# Altium PCB ElectromagneticPositioning.PcbDoc (part 1 of 3)
Units mm, origin at the board's own origin, x right, y up, seen from the top; angles counter-clockwise.
Board outline 163.96 x 78.23 mm, 2 copper layers (Top Layer, Bottom Layer); 269 components, 166 nets, 989 pads, 249 vias.
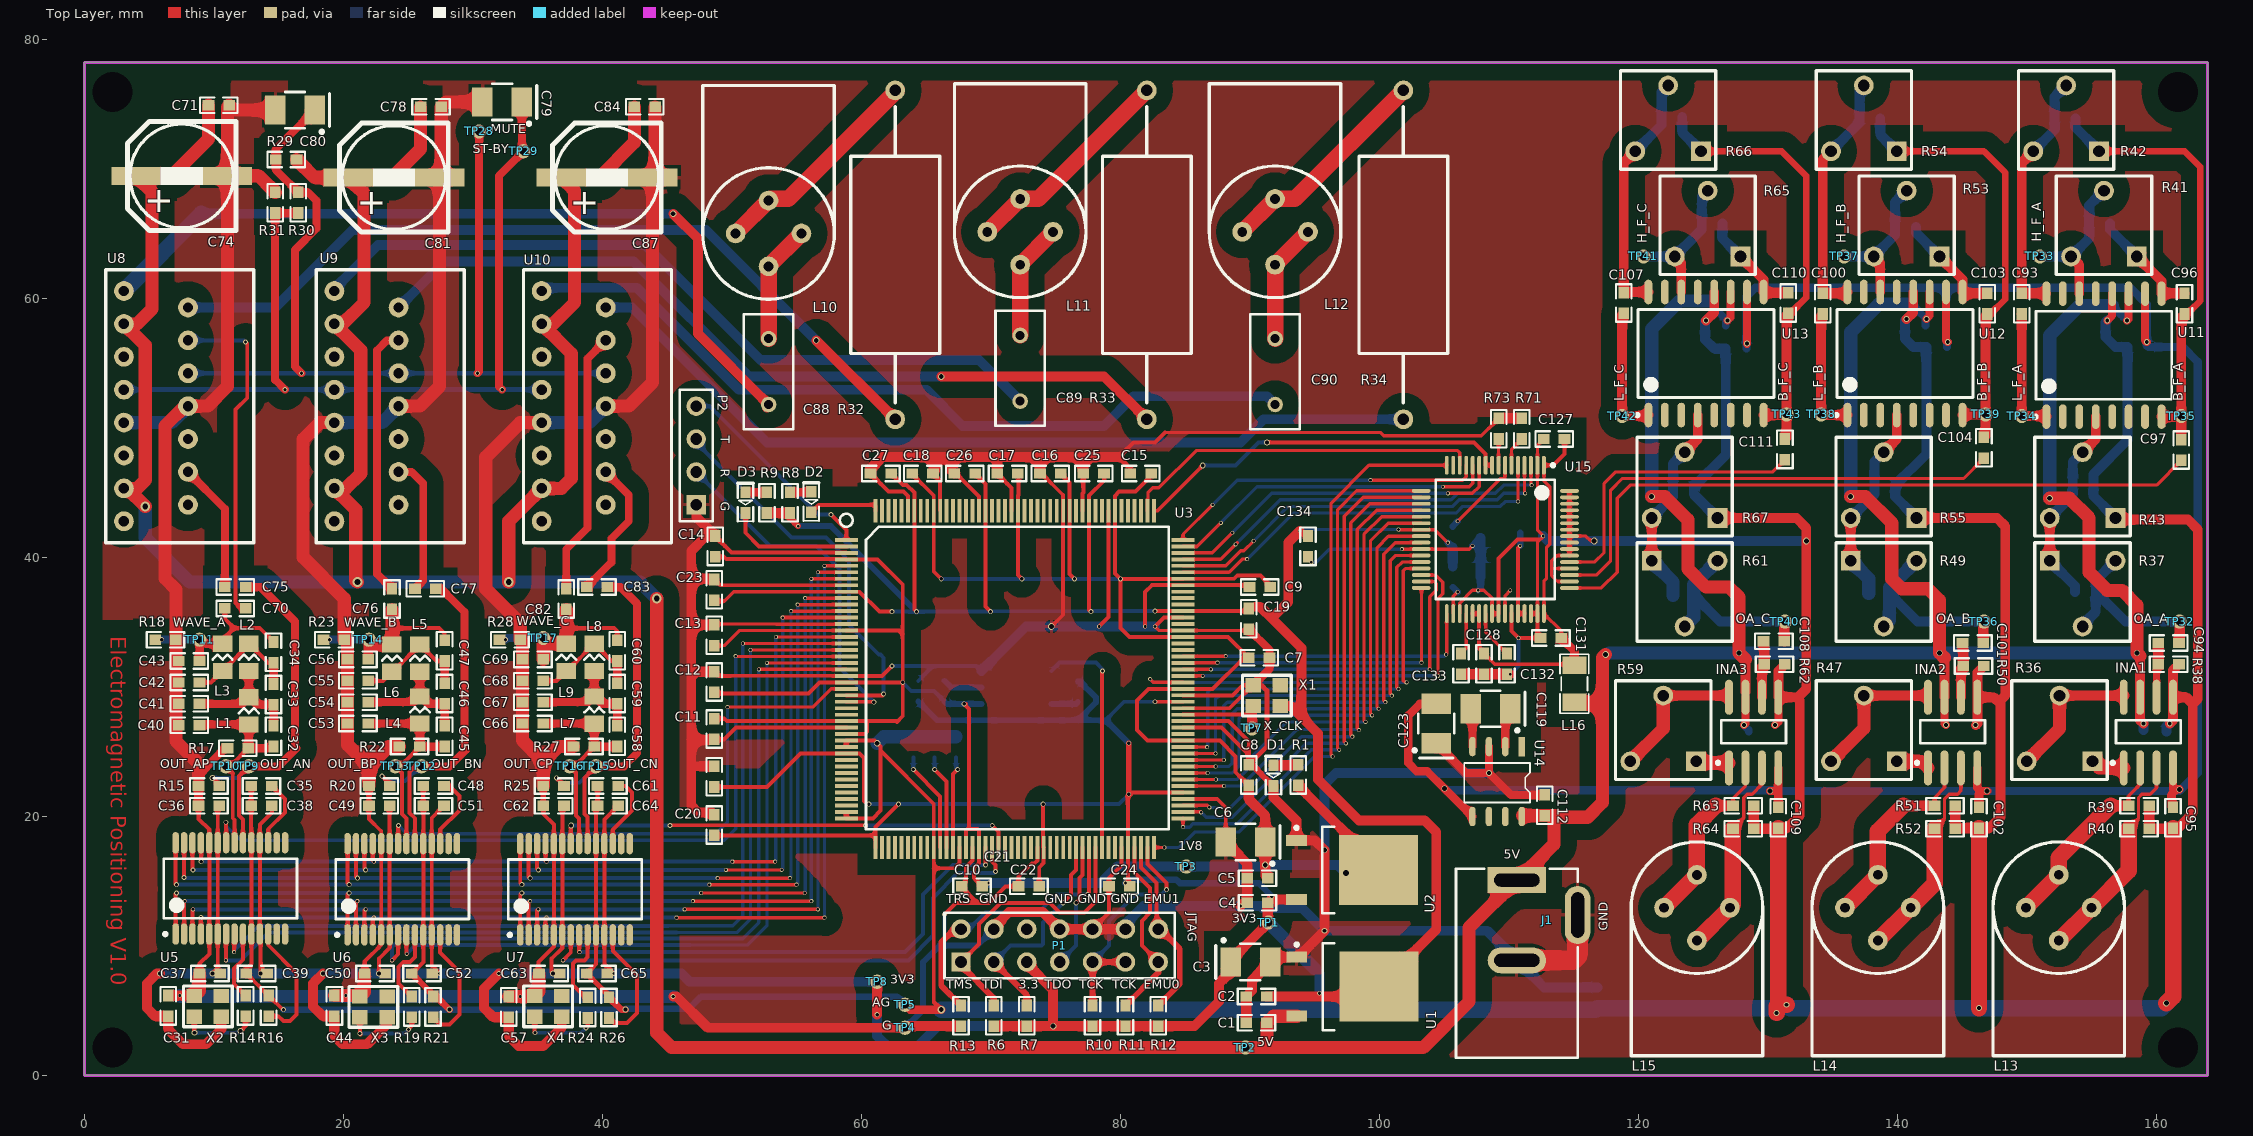
[diagram p0: Top Layer view]
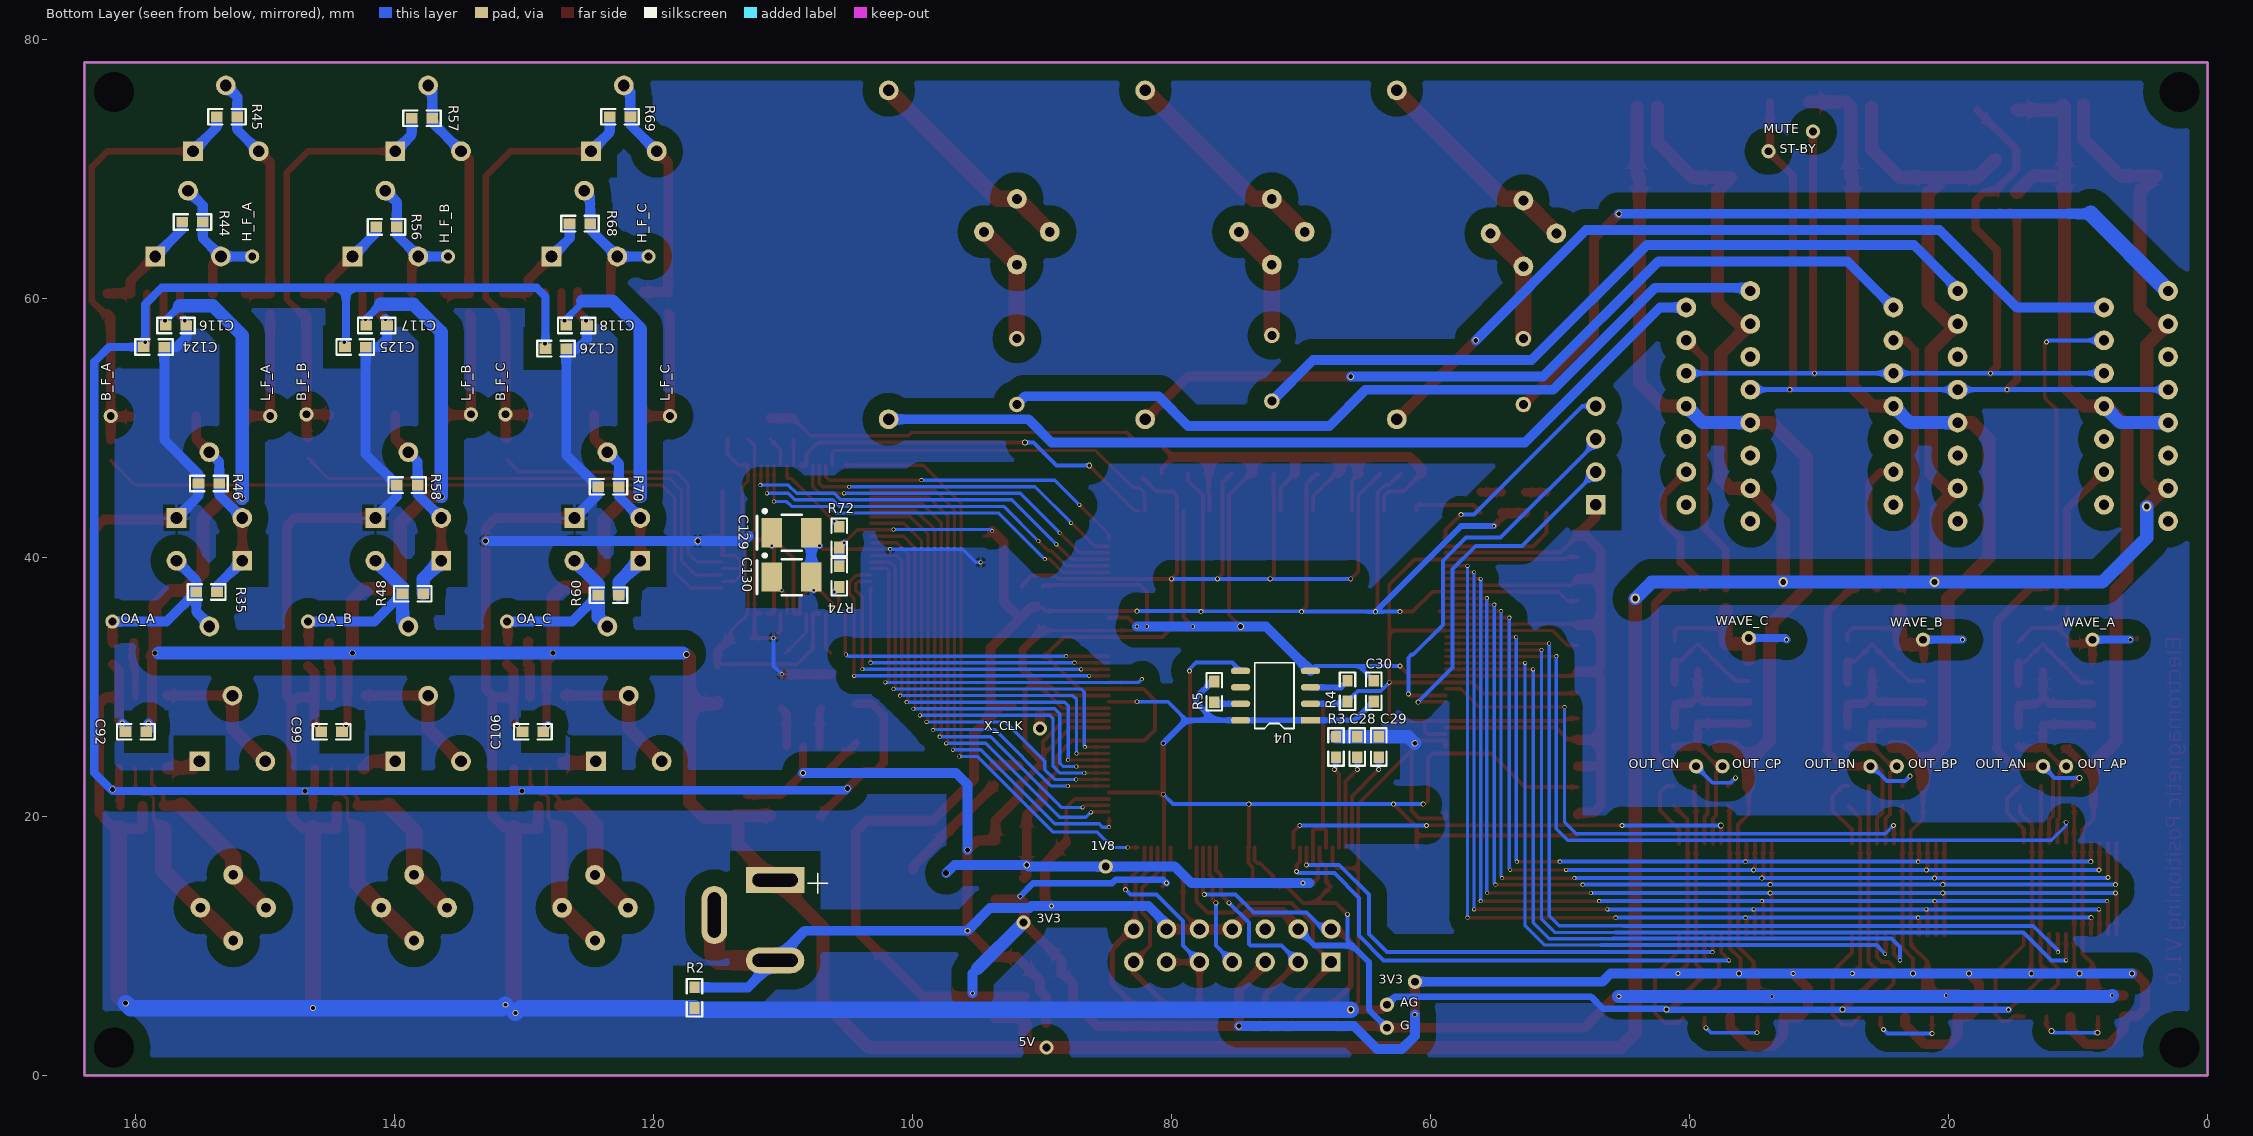
[diagram p1: Bottom Layer view, seen from below]

## Layer stack, top to bottom
Top Solder: solder mask 0.0102, Solder Resist, Dk 3.5
Top Layer: signal copper 0.0356
Dielectric 1: dielectric 0.32, FR-4, Dk 4.8
Bottom Layer: signal copper 0.0356
Bottom Solder: solder mask 0.0102, Solder Resist, Dk 3.5

## Board outline
0,0 0,78.232 163.957,78.232 163.957,0

## Design rules (kind name [scope] priority, off if disabled: settings)
Clearance [All] p1: gap=0.14
ComponentClearance [All] p1: gap=0 collisioncheckmode=3 verticalgap=0 showdistances=FALSE
HoleSize [All] p1: absolutevalues=TRUE maxlimit=25.4 minlimit=0.025 maxpercent=80.000 minpercent=20.000
HoleToHoleClearance [All] p1: gap=0.127 allowstackedmicrovias=TRUE
MinimumSolderMaskSliver [All] p1: minsoldermaskwidth=0.051
PolygonConnect [All] p1: connectstyle=Relief reliefconductorwidth=0.254 reliefentries=4 polygonreliefangle="90 Angle" airgapwidth=0.254
RoutingVias [All] p1: holewidth=0.305 width=0.457 viastyle="Through Hole" minholewidth=0.254 minwidth=0.254 maxholewidth=2.54 maxwidth=2.54
SilkToSilkClearance [All] p1: silktosilkclearance=0
SilkToSolderMaskClearance [IsPad] p1: minsilkscreentomaskgap=0 clearancetoexposedcopper=TRUE
SolderMaskExpansion [All] p1: expansion=0.102
Width [All] p1: maxlimit=5.08 minlimit=0.254 preferedwidth=0.254
24 further rules are at their usual default settings.

## Classes and differential pairs
component class RLC: C88 C89 C90 L10 L11 R32 R33 R34
component class OA: C92 C93 C94 C95 C96 C97 C99 C100 C101 C102 C103 C104 C106 C107 C108 C109 C110 C111 C112 C116 C117 C118 C119 C123 C124 C125 C126 INA1 INA2 INA3 R35 R36 R37 R38 R39 R40 R41 R42 R43 R44 R45 R46 R47 R48 R49 R50 R51 R52 R53 R54 R55 R56 R57 R58 R59 R60 R61 R62 R63 R64 R65 R66 R67 R68 R69 R70 TP32 TP33 TP34 TP35 TP36 TP37 TP38 TP39 TP40 TP41 TP42 TP43 U11 U12 U13 U14
component class L: L13 L14 L15
component class AMP: C70 C71 C74 C75 C76 C77 C78 C79 C80 C81 C82 C83 C84 C87 R29 R30 R31 TP28 TP29 U8 U9 U10
component class AD: C127 C128 C129 C130 C131 C132 C133 C134 L16 R71 R72 R73 R74 U15
net class OS[0..2]: OS0 OS1 OS2
net class DB[0..15]: DB0 DB1 DB2 DB3 DB4 DB5 DB6 DB7 DB8 DB9 DB10 DB11 DB12 DB13 DB14 DB15
net class DATA[0..7]: DATA0 DATA1 DATA2 DATA3 DATA4 DATA5 DATA6 DATA7
component class MCU: 5V C1 C2 C3 C4 C5 C6 C7 C8 C9 C10 C11 C12 C13 C14 C15 C16 C17 C18 C19 C20 C21 C22 C23 C24 C25 C26 C27 C28 C29 C30 D1 D2 D3 G J1 P1 P2 R1 R2 R3 R4 R5 R6 R7 R8 R9 R10 R11 R12 R13 TP1 TP2 TP3 TP4 TP5 TP7 U1 U2 U3 U4 X1
component class SINE: C31 C32 C33 C34 C35 C36 C37 C38 C39 C40 C41 C42 C43 C44 C45 C46 C47 C48 C49 C50 C51 C52 C53 C54 C55 C56 C57 C58 C59 C60 C61 C62 C63 C64 C65 C66 C67 C68 C69 L1 L2 L3 L4 L5 L6 L7 L8 L9 R14 R15 R16 R17 R18 R19 R20 R21 R22 R23 R24 R25 R26 R27 R28 TP8 TP9 TP10 TP11 TP12 TP13 TP14 TP15 TP16 TP17 U5 U6 U7 X2 X3 X4

## Components (designator, comment, footprint, x,y, rotation, side; value= is the part's Value field where it differs from the comment)
C1 "Cap" 0603 89.713,4.064 r0 top
C2 "Cap" 0603 89.713,6.096 r0 top
C3 "Cap Poll" "Cap 3528B" 88.517,8.763 r0 top
C4 "Cap" 0603 89.789,13.335 r0 top
C5 "Cap" 0603 89.789,15.24 r0 top
C6 "Cap Poll" "Cap 3528B" 91.186,18.034 r180 top
C7 "Cap" 0603 91.516,32.258 r180 top
C8 "Cap" 0603 89.916,24.003 r270 top
C9 "Cap" 0603 89.967,37.719 r0 top
C10 "Cap" 0603 67.742,14.605 r0 top
C11 "Cap" 0603 48.641,25.959 r90 top
C12 "Cap" 0603 48.641,31.191 r270 top
C13 "Cap" 0603 48.641,34.798 r270 top
C14 "Cap" 0603 48.704,41.656 r270 top
C15 "Cap" 0603 80.772,46.482 r0 top
C16 "Cap" 0603 73.787,46.482 r0 top
C17 "Cap" 0603 70.485,46.482 r0 top
C18 "Cap" 0603 65.532,46.482 r180 top
C19 "Cap" 0603 89.916,34.468 r90 top
C20 "Cap" 0603 48.641,20.142 r270 top
C21 "Cap" 0603 48.641,23.876 r270 top
C22 "Cap" 0603 72.136,14.605 r0 top
C23 "Cap" 0603 48.641,38.303 r270 top
C24 "Cap" 0603 79.121,14.605 r0 top
C25 "Cap" 0603 77.14,46.482 r0 top
C26 "Cap" 0603 67.183,46.482 r0 top
C27 "Cap" 0603 60.706,46.482 r0 top
C28 "Cap" 0603 65.659,24.562 r90 bottom
C29 "Cap" 0603 64.008,24.562 r90 bottom
C30 "Cap" 0603 64.389,30.48 r270 bottom
C31 "Cap" 0603 6.477,6.172 r270 top
C32 "Cap" 0603 14.605,25.4 r90 top
C33 "Cap" 0603 14.605,28.626 r90 top
C34 "Cap" 0603 14.605,31.877 r90 top
C35 "Cap" 0603 14.478,22.352 r180 top
C36 "Cap" 0603 8.814,20.828 r0 top
C37 "Cap" 0603 8.89,7.874 r0 top
C38 "Cap" 0603 12.878,20.828 r0 top
C39 "Cap" 0603 12.497,7.874 r0 top
C40 "Cap" 0603 7.29,27.051 r0 top
C41 "Cap" 0603 7.29,28.702 r0 top
C42 "Cap" 0603 7.29,30.353 r0 top
C43 "Cap" 0603 7.29,32.004 r0 top
C44 "Cap" 0603 19.304,6.172 r270 top
C45 "Cap" 0603 27.813,25.4 r90 top
C46 "Cap" 0603 27.813,28.702 r90 top
C47 "Cap" 0603 27.813,32.004 r90 top
C48 "Cap" 0603 27.762,22.352 r180 top
C49 "Cap" 0603 21.971,20.828 r0 top
C50 "Cap" 0603 21.641,7.874 r0 top
C51 "Cap" 0603 26.162,20.828 r0 top
C52 "Cap" 0603 25.273,7.874 r0 top
C53 "Cap" 0603 20.32,27.178 r0 top
C54 "Cap" 0603 20.32,28.829 r0 top
C55 "Cap" 0603 20.32,30.48 r0 top
C56 "Cap" 0603 20.32,32.131 r0 top
C57 "Cap" 0603 32.766,4.496 r90 top
C58 "Cap" 0603 41.148,25.4 r90 top
C59 "Cap" 0603 41.148,28.702 r90 top
C60 "Cap" 0603 41.148,32.004 r90 top
C61 "Cap" 0603 39.624,22.352 r0 top
C62 "Cap" 0603 35.433,20.828 r0 top
C63 "Cap" 0603 35.103,7.874 r0 top
C64 "Cap" 0603 39.624,20.828 r0 top
C65 "Cap" 0603 38.786,7.874 r0 top
C66 "Cap" 0603 33.833,27.178 r0 top
C67 "Cap" 0603 33.833,28.829 r0 top
C68 "Cap" 0603 33.833,30.48 r0 top
C69 "Cap" 0603 33.833,32.131 r0 top
C70 "Cap" 0603 10.846,36.068 r0 top
C71 "Cap" 0603 11.176,74.93 r180 top
C74 "Cap Poll" "cap贴片铝电解质470uF 16V" 3.998,69.469 r0 top
C75 "Cap" 0603 12.446,37.719 r180 top
C76 "Cap" 0603 23.749,35.992 r90 top
C77 "Cap" 0603 27.127,37.592 r180 top
C78 "Cap" 0603 27.559,74.803 r180 top
C79 "Cap Poll" "Cap 3528B" 33.782,75.184 r180 top
C80 "Cap Poll" "Cap 3528B" 17.78,74.549 r180 top
C81 "Cap Poll" "cap贴片铝电解质470uF 16V" 20.381,69.342 r0 top
C82 "Cap" 0603 37.211,35.992 r90 top
C83 "Cap" 0603 40.386,37.719 r180 top
C84 "Cap" 0603 44.069,74.803 r180 top
C87 "Cap Poll" "cap贴片铝电解质470uF 16V" 36.83,69.342 r0 top
C88 "1nF" RAD-0.2 52.832,54.356 r90 top
C89 "1nF" RAD-0.2 72.263,54.61 r90 top
C90 "1nF" RAD-0.2 91.948,54.356 r90 top
C92 "Cap" 0603 159.182,26.543 r0 bottom
C93 "Cap" 0603 149.606,58.801 r90 top
C94 "Cap" 0603 160.147,33.401 r0 top
C95 "Cap" 0603 161.29,19.101 r90 top
C96 "Cap" 0603 162.179,60.401 r270 top
C97 "Cap" 0603 161.925,49.098 r270 top
C99 "Cap" 0603 144.069,26.543 r0 bottom
C100 "Cap" 0603 134.239,58.801 r90 top
C101 "Cap" 0603 145.034,33.401 r0 top
C102 "Cap" 0603 146.304,19.101 r90 top
C103 "Cap" 0603 146.939,60.401 r270 top
C104 "Cap" 0603 146.685,49.276 r270 top
C106 "Cap" 0603 128.524,26.543 r0 bottom
C107 "Cap" 0603 118.872,58.852 r90 top
C108 "Cap" 0603 129.667,33.528 r0 top
C109 "Cap" 0603 130.81,19.101 r90 top
C110 "Cap" 0603 131.572,60.452 r270 top
C111 "Cap" 0603 131.318,49.149 r270 top
C112 "Cap" 0603 112.776,20.066 r90 top
C116 "Cap" 0603 156.083,57.912 r0 bottom
C117 "Cap" 0603 140.589,57.912 r0 bottom
C118 "Cap" 0603 125.146,57.912 r0 bottom
C119 "Cap Poll" "Cap 3528B" 110.111,28.321 r180 top
C123 "Cap Poll" "Cap 3528B" 104.394,25.654 r90 top
C124 "Cap" 0603 159.385,56.261 r180 bottom
C125 "Cap" 0603 143.84,56.261 r180 bottom
C126 "Cap" 0603 128.346,56.134 r180 bottom
C127 "Cap" 0603 114.3,49.149 r180 top
C128 "Cap" 0603 108.077,32.588 r270 top
C129 "Cap Poll" "Cap 3528B" 110.871,41.91 r180 bottom
C130 "Cap Poll" "Cap 3528B" 110.871,38.481 r180 bottom
C131 "Cap" 0603 112.446,33.782 r0 top
C132 "Cap" 0603 109.855,30.988 r90 top
C133 "Cap" 0603 106.299,30.988 r90 top
C134 "Cap" 0603 94.488,40.056 r90 top
D1 "LED" LED0603 91.821,23.952 r270 top
D2 "LED" LED0603 56.134,45.085 r270 top
D3 "LED" LED0603 51.054,45.034 r270 top
INA1 "INA129" LM386 159.385,26.543 r90 top
INA2 "INA129" LM386 144.272,26.543 r90 top
INA3 "INA129" LM386 128.905,26.543 r90 top
J1 "DC插座" "DC插座 5.5mm*2.1mm" 110.617,15.09 r90 top
L1 "470nH" 0805L 12.7,28.135 r90 top
L2 "390nH" 0805L 12.7,32.267 r90 top
L3 "390nH" 0805L 10.668,32.267 r90 top
L4 "470nH" 0805L 25.908,28.203 r90 top
L5 "390nH" 0805L 25.908,32.199 r90 top
L6 "390nH" 0805L 23.749,32.199 r90 top
L7 "470nH" 0805L 39.37,28.194 r90 top
L8 "390nH" 0805L 39.37,32.267 r90 top
L9 "390nH" 0805L 37.211,32.267 r90 top
L10 "inductor" inductor 52.832,65.024 r0 top
L11 "inductor" inductor 72.263,65.151 r0 top
L12 "inductor" inductor 91.948,65.151 r0 top
L13 "inductor" inductor 152.464,12.958 r180 top
L14 "inductor" inductor 138.494,12.958 r180 top
L15 "inductor" inductor 124.524,12.954 r180 top
L16 "Inductor" 0805_Inductor 115.062,28.829 r90 top
P1 "Header 7X2" HDR2X7 67.691,8.763 r0 top
P2 "Header 4" HDR1X4 47.244,44.069 r90 top
R1 "Res" 0603 93.726,24.003 r270 top
R2 "Res" 0603 116.84,5.207 r90 bottom
R3 "Res" 0603 67.31,26.162 r270 bottom
R4 "Res" 0603 66.421,30.48 r270 bottom
R5 "Res" 0603 76.708,28.829 r90 bottom
R6 "Res" 0603 70.231,3.81 r90 top
R7 "Res" 0603 72.771,3.81 r90 top
R8 "Res" 0603 54.483,43.434 r90 top
R9 "Res" 0603 52.705,43.434 r90 top
R10 "Res" 0603 77.851,3.81 r90 top
R11 "Res" 0603 80.391,3.81 r90 top
R12 "Res" 0603 82.931,3.81 r90 top
R13 "Res" 0603 67.691,3.81 r90 top
R14 "Res" 0603 12.446,6.172 r270 top
R15 "Res" 0603 10.414,22.352 r180 top
R16 "Res" 0603 14.224,6.172 r270 top
R17 "Res" 0603 11.049,25.273 r0 top
R18 "Res" 0603 7.061,33.655 r180 top
R19 "Res" 0603 25.273,6.096 r270 top
R20 "Res" 0603 23.571,22.352 r180 top
R21 "Res" 0603 26.924,6.096 r270 top
R22 "Res" 0603 24.308,25.4 r0 top
R23 "Res" 0603 20.066,33.655 r180 top
R24 "Res" 0603 38.862,6.045 r270 top
R25 "Res" 0603 37.033,22.352 r180 top
R26 "Res" 0603 40.513,6.045 r270 top
R27 "Res" 0603 37.77,25.4 r0 top
R28 "Res" 0603 33.655,33.655 r180 top
R29 "Res" 0603 16.383,70.739 r180 top
R30 "Res" 0603 16.51,68.199 r270 top
R31 "Res" 0603 14.732,68.199 r270 top
R32 "Res" Res_big 59.182,55.753 r90 top
R33 "Res" Res_big 78.613,55.753 r90 top
R34 "Res" Res_big 98.425,55.753 r90 top
R35 "Res" 0603 155.321,37.338 r180 bottom
R36 "电位器" 电位器WH06-2C 155.067,24.257 r180 top
R37 "电位器" 电位器WH06-2C 151.765,39.751 r0 top
R38 "Res" 0603 161.747,31.75 r180 top
R39 "Res" 0603 159.461,20.828 r180 top
R40 "Res" 0603 159.461,19.05 r180 top
R41 "电位器" 电位器WH06-2C 158.496,63.246 r180 top
R42 "电位器" 电位器WH06-2C 155.575,71.374 r180 top
R43 "电位器" 电位器WH06-2C 156.845,43.053 r180 top
R44 "Res" 0603 156.413,65.913 r180 bottom
R45 "Res" 0603 153.746,74.041 r180 bottom
R46 "Res" 0603 155.143,45.72 r180 bottom
R47 "电位器" 电位器WH06-2C 139.954,24.257 r180 top
R48 "Res" 0603 139.395,37.211 r180 bottom
R49 "电位器" 电位器WH06-2C 136.398,39.751 r0 top
R50 "Res" 0603 146.685,31.623 r180 top
R51 "Res" 0603 144.475,20.828 r180 top
R52 "Res" 0603 144.475,19.05 r180 top
R53 "电位器" 电位器WH06-2C 143.256,63.246 r180 top
R54 "电位器" 电位器WH06-2C 139.954,71.374 r180 top
R55 "电位器" 电位器WH06-2C 141.478,43.053 r180 top
R56 "Res" 0603 141.427,65.532 r180 bottom
R57 "Res" 0603 138.684,73.914 r180 bottom
R58 "Res" 0603 139.827,45.593 r180 bottom
R59 "电位器" 电位器WH06-2C 124.46,24.257 r180 top
R60 "Res" 0603 124.282,37.084 r180 bottom
R61 "电位器" 电位器WH06-2C 121.031,39.751 r0 top
R62 "Res" 0603 131.318,31.75 r180 top
R63 "Res" 0603 128.905,20.828 r180 top
R64 "Res" 0603 128.905,19.05 r180 top
R65 "电位器" 电位器WH06-2C 127.889,63.246 r180 top
R66 "电位器" 电位器WH06-2C 124.841,71.374 r180 top
R67 "电位器" 电位器WH06-2C 126.111,43.053 r180 top
R68 "Res" 0603 126.492,65.786 r180 bottom
R69 "Res" 0603 123.393,74.041 r180 bottom
R70 "Res" 0603 124.282,45.466 r180 bottom
R71 "Res" 0603 110.998,50.749 r270 top
R72 "Res" 0603 105.664,40.767 r90 bottom
R73 "Res" 0603 109.22,50.749 r270 top
R74 "Res" 0603 105.664,37.719 r90 bottom
TP1 "testPoint" TP_H 91.44,11.811 r90 top
TP2 "testPoint" TP_H 89.662,2.159 r90 top
TP3 "testPoint" TP_H 85.09,16.129 r90 top
TP4 "testPoint" TP_H 63.373,3.683 r90 top
TP5 "testPoint" TP_H 63.373,5.461 r90 top
TP7 "testPoint" TP_H 90.17,26.797 r90 top
TP8 "testPoint" TP_H 61.214,7.239 r90 top
TP9 "testPoint" TP_H 12.7,23.876 r90 top
TP10 "testPoint" TP_H 10.922,23.876 r180 top
TP11 "testPoint" TP_H 8.89,33.655 r180 top
TP12 "testPoint" TP_H 26.035,23.876 r180 top
TP13 "testPoint" TP_H 24.003,23.876 r180 top
TP14 "testPoint" TP_H 21.971,33.655 r90 top
TP15 "testPoint" TP_H 39.497,23.876 r90 top
TP16 "testPoint" TP_H 37.465,23.876 r90 top
TP17 "testPoint" TP_H 35.433,33.782 r90 top
TP28 "testPoint" TP_H 30.48,72.898 r180 top
TP29 "testPoint" TP_H 33.909,71.374 r180 top
TP32 "testPoint" TP_H 161.798,35.052 r90 top
TP33 "testPoint" TP_H 151.003,63.246 r90 top
TP34 "testPoint" TP_H 149.606,50.927 r90 top
TP35 "testPoint" TP_H 161.925,50.927 r90 top
TP36 "testPoint" TP_H 146.685,35.052 r90 top
TP37 "testPoint" TP_H 135.89,63.246 r90 top
TP38 "testPoint" TP_H 134.112,51.054 r90 top
TP39 "testPoint" TP_H 146.812,51.054 r90 top
TP40 "testPoint" TP_H 131.318,35.052 r90 top
TP41 "testPoint" TP_H 120.396,63.246 r180 top
TP42 "testPoint" TP_H 118.745,50.927 r90 top
TP43 "testPoint" TP_H 131.445,51.054 r90 top
U1 "AMS1117-3.3" TO-252-2L 97.917,6.858 r180 top
U2 "AMS1117-1.8" TO-252-2L 97.899,15.869 r180 top
U3 "TMS320F28335" TMS320F28335 58.836,41.36 r270 top
U4 "TPS3307-1.8" SOP-8 69.276,27.432 r0 bottom
U5 "AD9850" SOP65P780X198-28N#1 7.044,10.922 r90 top
U6 "AD9850" SOP65P780X198-28N#2 20.32,10.857 r90 top
U7 "AD9850" SOP65P780X198-28N#1 33.655,10.857 r90 top
U8 "TDA7266" TDA7266 3.048,60.579 r270 top
U9 "TDA7266" TDA7266 19.304,60.579 r270 top
U10 "TDA7266" TDA7266 35.306,60.579 r270 top
U11 "UAF42AU(16_PINS)" SOIC127P1030X265-16N 155.956,55.626 r90 top
U12 "UAF42AU(16_PINS)" SOIC127P1030X265-16N 140.589,55.753 r90 top
U13 "UAF42AU(16_PINS)" SOIC127P1030X265-16N 125.222,55.753 r90 top
U14 "ICL7660" "ICL7660 sop-8" 110.998,25.4 r270 top
U15 "AD7606" TSQFP50P1200X1200X160-64N 112.706,47.123 r270 top
X1 "30MHz" 3225 91.313,29.337 r180 top
X2 "110MHz" 3225 9.525,5.334 r180 top
X3 "110MHz" 3225 22.318,5.296 r180 top
X4 "110MHz" 3225 35.814,5.334 r180 top

## Footprints (in the part's own frame and the unit in brackets; to place one, negate y for a bottom-side part, rotate by r counter-clockwise, add the part's x,y. Pads: shape width x height; smd on the part's side, far side on the other; paste and mask are expansions set on the pad)
0603 [mm]
  rect 0.9x0.8 smd: 1(0,0) 2(1.6,0)
  silkscreen extent -0.65,-0.6 2.25,0.6
0805_Inductor [mm]
  rect 1.35x1.85 smd: 1(0,0) 2(2.85,0)
  silkscreen extent -0.86,-1.12 3.71,1.12
0805L [mm]
  rect 1.25x1.5 smd: 1(-1.025,0) 2(1.075,0)
  silkscreen extent -0.15,-0.76 0.23,0.76, body extent -1.15,-0.67 1.15,0.68, height 0.76
3225 [mm]
  rect 1.2x1.1 smd: 1(-1.05,-0.8) 2(1.05,-0.8) 3(1.05,0.8) 4(-1.05,0.8)
  silkscreen extent -1.88,-1.57 1.88,1.57
"Cap 3528B" [mm]
  rect 1.6x2.25 smd: 1(0,0) 2(3.05,0)
  silkscreen extent -1.14,-1.4 2.29,1.8, body extent -0.23,-1.4 3.27,1.4, height 1.9
"cap贴片铝电解质470uF 16V" [mm] "铝电解质 470uF 16V"
  rect 3.8x1.4 smd: 1(0,0) 2(7.051,0)
  silkscreen extent -0.69,-4.22 7.71,4.2
"DC插座 5.5mm*2.1mm" [mm]
  rect 2x4.5 hole 1 slot 3.5 at 90 deg: 1(0,0)
  oval 2x4.5 hole 1 slot 3.5 at 90 deg: 2(-6.2,0)
  oval 4.5x2 hole 1 slot 3.5 at 0 deg: 3(-2.7,-4.7)
  silkscreen extent -13.72,-4.7 0.89,4.7
HDR1X4 [mm] "Connector; Header; 4 Position"
  rect 1.5x1.5 hole 0.9: 1(0,0)
  round 1.5 hole 0.9: 2(2.54,0) 3(5.08,0) 4(7.62,0)
  silkscreen extent -1.27,-1.27 8.89,1.27
HDR2X7 [mm] "Connector; Header; 7x2 Position"
  rect 1.5x1.5 hole 0.9: 1(0,0)
  round 1.5 hole 0.9: 2(0,2.54) 3(2.54,0) 4(2.54,2.54) 5(5.08,0) 6(5.08,2.54) 7(7.62,0) 8(7.62,2.54) 9(10.16,0) 10(10.16,2.54) 11(12.7,0) 12(12.7,2.54) 13(15.24,0) 14(15.24,2.54)
  silkscreen extent -1.27,-1.27 16.51,3.81
"ICL7660 sop-8" [mm]
  rect 1.5x0.5 smd: 1(0,0)
  oval 1.5x0.5 smd: 2(0,-1.27) 3(0,-2.54) 4(0,-3.81) 5(5.4,-3.81) 6(5.4,-2.54) 7(5.4,-1.27) 8(5.4,0)
  silkscreen extent 1.27,-4.44 4.32,0.64
inductor [mil]
  round 60 hole 30: 1(-100,0) 1(0,100) 2(0,-100) 2(100,0)
  silkscreen extent -200,-200 200,450
LED0603 [mm]
  rect 0.9x0.8 smd: 1(0,0) 2(1.6,0)
  silkscreen extent -0.69,-0.6 2.25,0.6
LM386 [mm]
  oval 2.708x0.6 smd: 1(-2.794,1.905) 2(-2.794,0.635) 3(-2.794,-0.635) 4(-2.794,-1.905) 5(2.667,-1.905) 6(2.667,-0.635) 7(2.667,0.635) 8(2.667,1.905)
  silkscreen extent -2.52,-2.5 0.9,2.88, body extent -1.95,-2.45 1.95,2.45, height 1.75
RAD-0.2 [mm] "Radial Cap, Thru-Hole; 2 Leads; 0.2 in Pin Spacing"
  round 1.2 hole 0.7: 1(-2.54,0) 2(2.54,0)
  silkscreen extent -4.44,-1.91 4.44,1.91
Res_big [mil]
  round 60 hole 35: 1(-200,-135) 2(800,-135)
  silkscreen extent -150,-270 750,0
SOIC127P1030X265-16N [mm] "SOIC, 16-Leads, Body 10.30x7.50mm, Pitch 1.27mm, IPC Medium Density"
  oval 1.9x0.6 smd: 1(-4.75,4.445) 2(-4.75,3.175) 3(-4.75,1.905) 4(-4.75,0.635) 5(-4.75,-0.635) 6(-4.75,-1.905) 7(-4.75,-3.175) 8(-4.75,-4.445) 9(4.75,-4.445) 10(4.75,-3.175) 11(4.75,-1.905) 12(4.75,-0.635) 13(4.75,0.635) 14(4.75,1.905) 15(4.75,3.175) 16(4.75,4.445)
  silkscreen extent -4.87,-5.25 3.4,5.42, body extent -3.8,-5.25 3.8,5.25, height 2.65
SOP65P780X198-28N#1 [mm] "SOP, 28-Leads, Body 10.21x5.29mm, Pitch 0.65mm, IPC Medium Density"
  oval 1.65x0.5 smd: 1(0,0) 2(0,-0.65) 3(0,-1.3) 4(0,-1.95) 5(0,-2.6) 6(0,-3.25) 7(0,-3.9) 8(0,-4.55) 9(0,-5.2) 10(0,-5.85) 11(0,-6.5) 12(0,-7.15) 13(0,-7.8) 14(0,-8.45) 15(7.05,-8.45) 16(7.05,-7.8) 17(7.05,-7.15) 18(7.05,-6.5) 19(7.05,-5.85) 20(7.05,-5.2) 21(7.05,-4.55) 22(7.05,-3.9) 23(7.05,-3.25) 24(7.05,-2.6) 25(7.05,-1.95) 26(7.05,-1.3) 27(7.05,-0.65) 28(7.05,0)
  silkscreen extent -0.12,-9.38 5.82,0.92, body extent 0.82,-9.38 6.22,0.92, height 1.98
SOP65P780X198-28N#2 [mm] "SOP, 28-Leads, Body 10.21x5.29mm, Pitch 0.65mm, IPC Medium Density"
  oval 1.65x0.5 smd: 1(0,0) 3(0,-1.3) 4(0,-1.95) 5(0,-2.6) 6(0,-3.25) 7(0,-3.9) 8(0,-4.55) 9(0,-5.2) 10(0,-5.85) 11(0,-6.5) 12(0,-7.15) 13(0,-7.8) 14(0,-8.45) 15(7.05,-8.45) 16(7.05,-7.8) 17(7.05,-7.15) 18(7.05,-6.5) 19(7.05,-5.85) 20(7.05,-5.2) 21(7.05,-4.55) 22(7.05,-3.9) 23(7.05,-3.25) 24(7.05,-2.6) 25(7.05,-1.95) 26(7.05,-1.3) 27(7.05,-0.65) 28(7.05,0)
  oval 1.65x0.5 smd mask+0.102: 2(0,-0.65)
  silkscreen extent -0.12,-9.38 5.82,0.92, body extent 0.82,-9.38 6.22,0.92, height 1.98
SOP-8 [mm]
  rect 1.5x0.5 smd: 1(0,0)
  oval 1.5x0.5 smd: 2(0,-1.27) 3(0,-2.54) 4(0,-3.81) 5(5.4,-3.81) 6(5.4,-2.54) 7(5.4,-1.27) 8(5.4,0)
  silkscreen extent 1.27,-4.44 4.32,0.64
TDA7266 [mil]
  round 60 hole 31.5: 1(0,0) 2(50,195) 3(100,0) 4(150,195) 5(200,0) 6(250,195) 7(300,0) 8(350,195) 9(400,0) 10(450,195) 11(500,0) 12(550,195) 13(600,0) 14(650,195) 15(700,0)
  silkscreen extent -65,-55 765,395
TMS320F28335 [mm]
  rect 0.3x1.778 smd: 1(0,0) 2(0.5,0) 3(1,0) 4(1.5,0) 5(2,0) 6(2.5,0) 7(3,0) 8(3.5,0) 9(4,0) 10(4.5,0) 11(5,0) 12(5.5,0) 13(6,0) 14(6.5,0) 15(7,0) 16(7.5,0) 17(8,0) 18(8.5,0) 19(9,0) 20(9.5,0) 21(10,0) 22(10.5,0) 23(11,0) 24(11.5,0) 25(12,0) 26(12.5,0) 27(13,0) 28(13.5,0) 29(14,0) 30(14.5,0) 31(15,0) 32(15.5,0) 33(16,0) 34(16.5,0) 35(17,0) 36(17.5,0) 37(18,0) 38(18.5,0) 39(19,0) 40(19.5,0) 41(20,0) 42(20.5,0) 43(21,0) 44(21.5,0) 89(21.5,26) 90(21,26) 91(20.5,26) 92(20,26) 93(19.5,26) 94(19,26) 95(18.5,26) 96(18,26) 97(17.5,26) 98(17,26) 99(16.5,26) 100(16,26) 101(15.5,26) 102(15,26) 103(14.5,26) 104(14,26) 105(13.5,26) 106(13,26) 107(12.5,26) 108(12,26) 109(11.5,26) 110(11,26) 111(10.5,26) 112(10,26) 113(9.5,26) 114(9,26) 115(8.5,26) 116(8,26) 117(7.5,26) 118(7,26) 119(6.5,26) 120(6,26) 121(5.5,26) 122(5,26) 123(4.5,26) 124(4,26) 125(3.5,26) 126(3,26) 127(2.5,26) 128(2,26) 129(1.5,26) 130(1,26) 131(0.5,26) 132(0,26)
  rect 1.778x0.3 smd: 45(23.75,2.25) 46(23.75,2.75) 47(23.75,3.25) 48(23.75,3.75) 49(23.75,4.25) 50(23.75,4.75) 51(23.75,5.25) 52(23.75,5.75) 53(23.75,6.25) 54(23.75,6.75) 55(23.75,7.25) 56(23.75,7.75) 57(23.75,8.25) 58(23.75,8.75) 59(23.75,9.25) 60(23.75,9.75) 61(23.75,10.25) 62(23.75,10.75) 63(23.75,11.25) 64(23.75,11.75) 65(23.75,12.25) 66(23.75,12.75) 67(23.75,13.25) 68(23.75,13.75) 69(23.75,14.25) 70(23.75,14.75) 71(23.75,15.25) 72(23.75,15.75) 73(23.75,16.25) 74(23.75,16.75) 75(23.75,17.25) 76(23.75,17.75) 77(23.75,18.25) 78(23.75,18.75) 79(23.75,19.25) 80(23.75,19.75) 81(23.75,20.25) 82(23.75,20.75) 83(23.75,21.25) 84(23.75,21.75) 85(23.75,22.25) 86(23.75,22.75) 87(23.75,23.25) 88(23.75,23.75) 133(-2.25,23.75) 134(-2.25,23.25) 135(-2.25,22.75) 136(-2.25,22.25) 137(-2.25,21.75) 138(-2.25,21.25) 139(-2.25,20.75) 140(-2.25,20.25) 141(-2.25,19.75) 142(-2.25,19.25) 143(-2.25,18.75) 144(-2.25,18.25) 145(-2.25,17.75) 146(-2.25,17.25) 147(-2.25,16.75) 148(-2.25,16.25) 149(-2.25,15.75) 150(-2.25,15.25) 151(-2.25,14.75) 152(-2.25,14.25) 153(-2.25,13.75) 154(-2.25,13.25) 155(-2.25,12.75) 156(-2.25,12.25) 157(-2.25,11.75) 158(-2.25,11.25) 159(-2.25,10.75) 160(-2.25,10.25) 161(-2.25,9.75) 162(-2.25,9.25) 163(-2.25,8.75) 164(-2.25,8.25) 165(-2.25,7.75) 166(-2.25,7.25) 167(-2.25,6.75) 168(-2.25,6.25) 169(-2.25,5.75) 170(-2.25,5.25) 171(-2.25,4.75) 172(-2.25,4.25) 173(-2.25,3.75) 174(-2.25,3.25) 175(-2.25,2.75) 176(-2.25,2.25)
  silkscreen extent -2.02,-0.5 22.35,24.89
TO-252-2L [mm]
  rect 1.6x0.85 smd: 1(4.3,-2.28) 3(4.3,2.28)
  rect 6.1x5.4 smd: 4(-2.05,0)
  silkscreen extent 1.4,-3.38 4.42,3.35, body extent -5.1,-3.37 5,3.37, height 2.37
TP_H [mm]
  round 1.1 hole 0.6: 1(0,0)
TSQFP50P1200X1200X160-64N [mm] "TSQFP, 64-Leads, Body 10.00x10.00mm, Pitch 0.50mm, IPC Medium Density"
  oval 1.45x0.3 smd: 1(0,0) 2(0,-0.5) 3(0,-1) 4(0,-1.5) 5(0,-2) 6(0,-2.5) 7(0,-3) 8(0,-3.5) 9(0,-4) 10(0,-4.5) 11(0,-5) 12(0,-5.5) 13(0,-6) 14(0,-6.5) 15(0,-7) 16(0,-7.5) 33(11.45,-7.5) 34(11.45,-7) 35(11.45,-6.5) 36(11.45,-6) 37(11.45,-5.5) 38(11.45,-5) 39(11.45,-4.5) 40(11.45,-4) 41(11.45,-3.5) 42(11.45,-3) 43(11.45,-2.5) 44(11.45,-2) 45(11.45,-1.5) 46(11.45,-1) 47(11.45,-0.5) 48(11.45,0)
  oval 0.3x1.45 smd: 17(1.975,-9.475) 18(2.475,-9.475) 19(2.975,-9.475) 20(3.475,-9.475) 21(3.975,-9.475) 22(4.475,-9.475) 23(4.975,-9.475) 24(5.475,-9.475) 25(5.975,-9.475) 26(6.475,-9.475) 27(6.975,-9.475) 28(7.475,-9.475) 29(7.975,-9.475) 30(8.475,-9.475) 31(8.975,-9.475) 32(9.475,-9.475) 49(9.475,1.975) 50(8.975,1.975) 51(8.475,1.975) 52(7.975,1.975) 53(7.475,1.975) 54(6.975,1.975) 55(6.475,1.975) 56(5.975,1.975) 57(5.475,1.975) 58(4.975,1.975) 59(4.475,1.975) 60(3.975,1.975) 61(3.475,1.975) 62(2.975,1.975) 63(2.475,1.975) 64(1.975,1.975)
  silkscreen extent -0.12,-8.35 10.33,0.85, body extent 0.72,-8.75 10.73,1.25, height 1.6
电位器WH06-2C [mil]
  rect 60x60 hole 35.43: 1(0,0)
  round 60 hole 35.43: 2(100,-200) 3(200,0)
  silkscreen extent -45,-245 245,55

## Part data
C88 C89 C90: library part Cap
L1 L2 L3 L4 L5 L6 L7 L8 L9: library part Inductor
P1: "Header, 7-Pin, Dual row"
P2: "Header, 4-Pin"
TP1 TP2 TP3 TP4 TP5 TP7 TP8 TP9 TP10 TP11 TP12 TP13 TP14 TP15 TP16 TP17 TP28 TP29 TP32 TP33 TP34 TP35 TP36 TP37 TP38 TP39 TP40 TP41 TP42 TP43: library part TP
U1 U2: library part AMS1117
X1 X2 X3 X4: library part Oscillator

## Free pads (board coordinates)
  round 1.524 hole 3.1: 2(2.159,2.159) 2(2.159,75.946) 2(161.671,2.159) 2(161.671,75.946)

## Via types
v1: diameter 0.305, hole 0.203, Top Layer to Bottom Layer, 111 vias
v2: diameter 0.381, hole 0.254, Top Layer to Bottom Layer, 76 vias
v3: diameter 0.457, hole 0.305, Top Layer to Bottom Layer, 34 vias
v4: diameter 0.508, hole 0.381, Top Layer to Bottom Layer, 14 vias
v5: diameter 0.457, hole 0.381, Top Layer to Bottom Layer, 8 vias
v6: diameter 0.762, hole 0.457, Top Layer to Bottom Layer, 4 vias
v7: diameter 0.508, hole 0.457, Top Layer to Bottom Layer, 1 vias
v8: diameter 0.559, hole 0.381, Top Layer to Bottom Layer, 1 vias

## Nets (pads, with @x,y where several pads share a name; then routed paths per layer and width w, separated by ;. In a path a pad name is that pad's centre, name@x,y a point inside that pad or via, vN(x,y) a via of type N, cw(c..) or ccw(c..) an arc to the next point about the centre after c; other vN are vias at no path point)
AD_IN_A: C97.2 U15.49 | length 54.7
  Top Layer w0.254: U15.49@114.681,37.648 117.15,37.648 118.364,38.862 118.364,44.577 119.38,45.593 160.02,45.593 C97.2@161.925,47.498
AD_IN_B: C104.2 U15.51 | length 38.9
  Top Layer w0.254: U15.51@114.681,38.648 116.753,38.648 117.856,39.751 117.856,45.212 118.745,46.101 145.11,46.101 C104.2@146.685,47.676
AD_IN_C: C111.2 U15.53 | length 23
  Top Layer w0.254: U15.53@114.681,39.648 116.61,39.648 117.348,40.386 117.348,45.72 118.237,46.609 130.378,46.609 C111.2@131.318,47.549
AGND: C28.2 C29.2 C35.2 C38.1 C39.1 C48.2 C51.1 C52.1 C61.1 C64.1 C65.1 C92.2 C95.1 C99.2 C102.1 C106.2 C109.1 C116.1 C117.1 C118.1 C124.2 C125.2 C126.2 C127.2 C128.2 C129.2 C130.2 C131.1 C132.1 C133.1 C134.1 INA1.5 INA2.5 INA3.5 R2.1 R3.1 R16.1 R21.1 R26.1 R38.1 R39.1 R40.1 R43.1 R46.1 R50.1 R51.1 R52.1 R55.1 R58.1 R62.1 R63.1 R64.1 R67.1 R70.1 TP5.1 U3.32 U3.33 U3.43 U3.44 U3.54 U3.58 U5.10 U5.19 U6.10 U6.19 U7.10 U7.19 U11.12 U12.12 U13.12 U15.2 U15.26 U15.35 U15.40 U15.41 U15.43 U15.46 U15.47 U15.50 U15.52 U15.54 U15.55 U15.56 U15.57 U15.58 U15.59 U15.60 U15.61 U15.62 U15.63 U15.64 | length 568.9
  Top Layer w0.254: v1(101.735,40.648) U15.26@103.231,40.648 106.942,40.648 v1(107.188,40.894) ; U15.35@106.206,35.673 106.206,36.483 107.188,37.465 v1(107.632,37.465) 108.077,37.465 108.706,36.836 U15.40@108.706,35.673 ; U15.47@112.206,35.673 112.206,41.172 v1@112.682,41.648 ; 112.37,41.377 v1(112.649,41.656) 112.649,41.681 112.217,42.113 112.217,47.112 U15.2@112.206,47.123 112.206,48.655 C127.2@112.7,49.149 ; U15.50@114.681,38.148 113.757,38.148 113.297,38.608 113.297,39.116 ; U15.52@114.681,39.148 113.329,39.148 113.297,39.116 ; U15.54@114.681,40.148 113.681,40.148 113.297,39.764 113.297,39.116 ; U15.57@114.681,41.648 114.689,41.656 115.951,41.656 116.332,41.275 v4(116.586,41.275)
  Top Layer w0.305: C35.2@12.878,22.352 C38.1@12.878,20.828 12.878,19.126 12.894,19.11 U5.19@12.894,17.972 U5.10@12.894,10.922 12.894,8.627 12.319,8.052 C39.1@12.497,7.874 14.199,6.172 R16.1@14.224,6.172 15.316,5.08 v2(15.367,5.08) ; C52.1@25.273,7.874 26.17,8.771 U6.10@26.17,10.857 U6.19@26.17,17.907 26.17,20.82 C51.1@26.162,20.828 C48.2@26.162,22.352 ; C65.1@38.786,7.874 39.505,8.593 U7.10@39.505,10.857 U7.19@39.505,17.907 39.505,20.709 C64.1@39.624,20.828 C61.1@39.624,22.352 ; U3.43@58.836,20.36 U3.44@58.836,19.86 60.881,19.86 61.468,20.447 61.468,25.098 ; U3.33@58.836,25.36 U3.32@58.836,25.86 61.008,25.86 v4(61.214,25.654) 61.468,25.4 61.468,25.098 ; v8(66.167,5.08) 65.586,5.661 65.586,16.002 ; U3.58@67.586,17.61 67.586,16.405 67.183,16.002 65.586,16.002 ; U15.40@108.706,35.673 U15.41@109.206,35.673 109.206,39.911 110.671,41.377 112.37,41.377 ; U15.43@110.206,35.673 110.206,34.32 v1(110.744,33.782) C131.1@112.446,33.782 112.206,34.022 U15.47@112.206,35.673 U15.46@111.706,35.673 ; U15.54@114.681,40.148 U15.55@114.681,40.648 U15.56@114.681,41.148 U15.57@114.681,41.648 U15.58@114.681,42.148 U15.59@114.681,42.648 U15.60@114.681,43.148 U15.61@114.681,43.648 U15.62@114.681,44.148 U15.63@114.681,44.648 U15.64@114.681,45.148 ; 61.468,25.098 65.586,20.98 U3.54@65.586,17.61 65.586,16.002
  Top Layer w0.381: C65.1@38.786,7.874 40.513,6.147 R26.1@40.513,6.045
  Top Layer w0.457: C52.1@25.273,7.874 26.924,6.223 R21.1@26.924,6.096
  Top Layer w0.508: R21.1@26.924,6.096 27.178,6.096 v3(28.194,5.08) ; R26.1@40.513,6.045 41.478,5.08 v3(41.783,5.08)
  Top Layer w0.61: v3(130.556,27.051) 130.81,27.305 INA3.5@130.81,29.21 ; v3(156.21,58.293) 156.591,58.674 U11.12@156.591,60.376
  Top Layer w0.635: TP5.1@63.373,5.461 63.754,5.08 v8(66.167,5.08)
  Top Layer w0.762: C133.1@106.299,30.988 C128.2@108.077,30.988 C132.1@109.855,30.988 v1(110.109,30.988) ; v3(125.222,58.293) 125.857,58.928 U13.12@125.857,60.503 ; R67.1@126.111,43.053 132.207,43.053 132.969,42.291 v4(132.969,41.275) 132.969,29.845 132.334,29.21 132.207,29.21 ; R63.1@128.905,20.828 R64.1@128.905,19.05 130.759,19.05 C109.1@130.81,19.101 131.496,19.101 132.461,20.066 132.461,28.956 132.207,29.21 ; R62.1@131.318,31.75 130.81,31.242 INA3.5@130.81,29.21 132.207,29.21 ; v3(140.716,58.42) 141.224,58.928 U12.12@141.224,60.503 ; R55.1@141.478,43.053 147.701,43.053 148.336,42.418 148.336,29.337 147.955,28.956 147.955,28.702 ; R51.1@144.475,20.828 R52.1@144.475,19.05 144.526,19.101 C102.1@146.304,19.101 147.117,19.101 147.955,19.939 147.955,28.702 ; v3(146.05,27.051) 146.177,27.178 INA2.5@146.177,29.21 ; R50.1@146.685,31.623 146.177,31.115 INA2.5@146.177,29.21 ; R43.1@156.845,43.053 156.972,42.926 162.433,42.926 163.195,42.164 163.195,29.083 162.814,28.702 ; R39.1@159.461,20.828 R40.1@159.461,19.05 C95.1@161.036,19.05 ; v3(161.036,27.178) 161.29,27.432 INA1.5@161.29,29.21 ; C95.1@161.29,19.101 161.689,19.101 162.503,19.914 162.503,20.009 162.814,20.32 162.814,28.702 ; R38.1@161.747,31.75 161.29,31.293 INA1.5@161.29,29.21 ; INA2.5@146.177,29.21 147.447,29.21 147.955,28.702 ; INA1.5@161.29,29.21 162.306,29.21 162.814,28.702
  Top Layer w1.27: v3(130.683,4.826) 130.683,5.334 130.81,5.461 ; C109.1@130.81,19.101 130.81,5.461 ; v3(131.445,5.461) 130.81,5.461 ; v3(146.304,5.207) C102.1@146.304,19.101 ; v4(160.782,5.588) 161.29,6.096 C95.1@161.29,19.101
  Bottom Layer w0.254: v1(94.742,39.624) 95.123,39.624 96.147,40.648 v1(101.735,40.648)
  Bottom Layer w0.305: v1(110.109,30.988) 110.744,31.623 v1(110.744,33.782)
  Bottom Layer w0.508: v2(15.367,5.08) v3(28.194,5.08) v3(41.783,5.08) 41.859,5.156 46.685,5.156 47.625,6.096 62.738,6.096 TP5.1@63.373,5.461 ; v1(107.188,40.894) C129.2@107.821,41.527 ; v1(107.632,37.465) 107.821,37.654 C130.2@107.821,38.481
  Bottom Layer w0.762: C130.2@107.821,38.481 C129.2@107.821,41.527 ; v1(112.649,41.656) 113.03,41.275 v4(116.586,41.275) v4(132.969,41.275) ; R2.1@116.713,5.08 R2.1@116.84,5.207 ; v3(125.222,58.293) 125.146,58.217 C118.1@125.146,57.912 125.146,56.845 125.857,56.134 C126.2@126.746,56.134 126.746,47.93 R70.1@124.282,45.466 124.282,44.882 R67.1@126.111,43.053 ; v3(140.716,58.42) 140.589,58.293 C117.1@140.589,57.912 140.589,56.896 141.224,56.261 C125.2@142.24,56.261 142.24,48.006 R58.1@139.827,45.593 139.827,44.704 R55.1@141.478,43.053 ; v3(156.21,58.293) 156.083,58.166 C116.1@156.083,57.912 156.083,57.023 156.845,56.261 C124.2@157.785,56.261 157.785,49.073 155.143,46.431 R46.1@155.143,45.72 155.143,44.755 R43.1@156.845,43.053 ; C92.2@160.782,26.543 160.782,26.924 v3(161.036,27.178)
  Bottom Layer w1.016: v4(61.214,25.654) 61.722,26.162 C29.2@64.008,26.162 C28.2@65.659,26.162 R3.1@67.31,26.162
  Bottom Layer w1.27: v8(66.167,5.08) R2.1@116.713,5.08 ; R2.1@116.84,5.207 130.302,5.207 v3(130.683,4.826) ; v3(131.445,5.461) 131.699,5.207 v3(146.304,5.207) 160.401,5.207 v4(160.782,5.588)
AVCC_5V: C127.1 C128.1 C131.2 L16.2 U15.1 U15.37 U15.38 U15.48 | length 31
  Top Layer w0.254: C128.1@108.077,32.588 108.915,31.75 114.991,31.75 L16.2@115.062,31.679 ; U15.1@112.706,47.123 112.706,45.917 113.157,45.466 113.157,41.021 112.903,40.767 112.903,38.354 112.706,38.157 U15.48@112.706,35.673 114.046,34.333 C131.2@114.046,33.782
  Top Layer w0.305: U15.37@107.206,35.673 U15.38@107.706,35.673 107.706,32.959 C128.1@108.077,32.588 ; U15.1@112.706,47.123 113.405,47.123 113.411,47.117 114.3,48.006 C127.1@114.3,49.149
  Top Layer w0.635: C131.2@114.046,33.782 115.062,32.766 L16.2@115.062,31.679
BUSY: U3.134 U15.14 | length 27.9
  Top Layer w0.254: U3.134@82.086,43.61 82.086,44.494 82.131,44.539 82.131,45.001 82.51,45.379 82.971,45.379 85.852,48.26 106.036,48.26 106.206,48.09 U15.14@106.206,47.123
CLKIN: TP7.1 U3.105 X1.3 | length 6.5
  Top Layer w0.305: U3.105@84.836,27.86 90.09,27.86 90.17,27.94
  Top Layer w0.762: TP7.1@90.17,26.797 90.17,27.94
CONVST: U3.133 U15.9 U15.10 | length 29.6
  Top Layer w0.305: U3.133@82.586,43.61 82.853,43.61 v3(86.36,47.117) ; v3(91.313,48.895) 107.315,48.895 108.206,48.004 U15.10@108.206,47.123 U15.9@108.706,47.123
  Bottom Layer w0.305: v3(86.36,47.117) 88.9,47.117 90.678,48.895 v3(91.313,48.895)
CS: U3.132 U15.13 | length 25
  Top Layer w0.254: U3.132@84.836,41.36 84.836,41.783 v1(87.122,44.069) ; v1(99.314,45.974) 106.426,45.974 106.706,46.254 U15.13@106.706,47.123
  Bottom Layer w0.254: v1(87.122,44.069) 89.027,45.974 v1(99.314,45.974)
DATA0: U3.5 U5.4 U6.4 U7.4 | length 81
  Top Layer w0.254: v1(45.72,12.192) v1(57.15,12.192) ; v1(57.15,39.36) U3.5@58.836,39.36
  Top Layer w0.305: U5.4@8.994,10.922 v2(8.994,12.192) ; U6.4@22.27,10.857 22.27,12.11 v1(22.352,12.192) ; U7.4@35.605,10.857 35.605,12.11 v1(35.687,12.192)
  Bottom Layer w0.254: v1(57.15,12.192) v1(57.15,39.36)
  Bottom Layer w0.305: v2(8.994,12.192) v1(22.352,12.192) v1(35.687,12.192) v1(45.72,12.192)
DATA1: U3.6 U5.3 U6.3 U7.3 | length 82.5
  Top Layer w0.254: v1(46.355,12.827) v1(56.642,12.827) ; v1@56.771,38.86 U3.6@58.836,38.86
  Top Layer w0.305: U5.3@8.382,10.96 U5.3@8.344,10.922 8.344,12.789 v1(8.382,12.827) ; U6.3@21.62,10.857 21.62,12.73 v1(21.717,12.827) ; U7.3@34.955,10.857 34.955,12.73 v1(35.052,12.827) ; v1(56.642,38.862) 56.644,38.86 v1@56.771,38.86
  Bottom Layer w0.254: v1(56.642,12.827) v1(56.642,38.862)
  Bottom Layer w0.305: v1(8.382,12.827) v1(21.717,12.827) v1(35.052,12.827) v1(46.355,12.827)
DATA2: U3.7 U5.2 U6.2 U7.2 | length 83.9
  Top Layer w0.254: v1(46.99,13.462) v1(56.134,13.462) ; v1(56.134,38.354) 58.83,38.354 U3.7@58.836,38.36
  Top Layer w0.305: U5.2@7.747,10.975 U5.2@7.694,10.922 7.694,13.409 v1(7.747,13.462) ; U6.2@20.97,10.857 20.97,13.35 v1(21.082,13.462) ; U7.2@34.305,10.857 34.305,13.35 v1(34.417,13.462)
  Bottom Layer w0.254: v1(56.134,13.462) v1(56.134,38.354)
  Bottom Layer w0.305: v1(7.747,13.462) v1(21.082,13.462) v1(34.417,13.462) v1(46.99,13.462)
DATA3: U3.10 U5.1 U6.1 U7.1 | length 84.3
  Top Layer w0.254: v1(47.625,14.097) v1(55.626,14.097) v1@55.656,14.097 ; v1(55.656,36.86) U3.10@58.836,36.86
  Top Layer w0.305: U5.1@7.044,10.922 7.044,14.029 v2(7.112,14.097) ; U6.1@20.32,10.857 20.32,13.97 v2(20.447,14.097) ; U7.1@33.655,10.857 33.655,13.97 v2(33.782,14.097)
  Bottom Layer w0.254: v1(55.626,14.097) 55.656,14.127 v1(55.656,36.86)
  Bottom Layer w0.305: v2(7.112,14.097) v2(20.447,14.097) v2(33.782,14.097) v1(47.625,14.097)
DATA4: U3.11 U5.28 U6.28 U7.28 | length 83
  Top Layer w0.254: v1(48.26,14.732) v1(54.991,14.732) ; v1(55.08,36.36) U3.11@58.836,36.36
  Top Layer w0.305: U5.28@7.044,17.972 7.044,14.8 v2(7.112,14.732) ; U6.28@20.32,17.907 20.32,14.859 v2(20.447,14.732) ; U7.28@33.655,17.907 33.655,14.859 v2(33.782,14.732)
  Bottom Layer w0.254: v1(54.991,14.732) 55.08,14.821 v1(55.08,36.36)
  Bottom Layer w0.305: v2(7.112,14.732) v2(20.447,14.732) v2(33.782,14.732) v1(48.26,14.732)
DATA5: U3.12 U5.27 U6.27 U7.27 | length 80.4
  Top Layer w0.254: v1(48.895,15.24) 54.471,15.24 v1@54.524,15.293 ; v1(54.564,35.86) U3.12@58.836,35.86 U3.12@59.344,35.86
  Top Layer w0.305: v2(7.694,15.293) U5.27@7.694,17.972 ; U6.27@20.97,17.907 20.97,15.352 v2(21.082,15.24) ; U7.27@34.305,17.907 34.305,15.352 v2(34.417,15.24)
  Bottom Layer w0.254: v1(54.483,15.24) 54.564,15.321 v1(54.564,35.86)
  Bottom Layer w0.305: v2(7.694,15.293) 7.747,15.24 v2(21.082,15.24) v2(34.417,15.24) v1(48.895,15.24)
DATA6: U3.13 U5.26 U6.26 U7.26 | length 76.2
  Top Layer w0.254: v1(49.53,15.875) v1(53.848,15.875)
  Top Layer w0.305: U5.26@8.344,17.972 8.344,15.913 v2(8.382,15.875) ; U6.26@21.62,17.907 21.62,15.972 v2(21.717,15.875) ; U7.26@34.955,17.907 34.955,15.972 v2(35.052,15.875) ; v1(53.921,35.36) U3.13@58.836,35.36
  Bottom Layer w0.254: v1(53.848,15.875) 53.921,15.948 v1(53.921,35.36)
  Bottom Layer w0.305: v2(8.382,15.875) v2(21.717,15.875) v2(35.052,15.875) v1(49.53,15.875)
DATA7: U3.16 U5.25 U6.25 U7.25 | length 71.5
  Top Layer w0.254: v1(50.038,16.51) v1(53.34,16.51) ; v1(53.389,33.86) U3.16@58.836,33.86
  Top Layer w0.305: U5.25@8.994,17.972 9.017,17.949 v2(9.017,16.51) ; U6.25@22.27,17.907 22.27,16.592 v1(22.352,16.51) ; U7.25@35.605,17.907 35.605,16.592 v1(35.687,16.51)
  Bottom Layer w0.254: v1(53.34,16.51) 53.389,16.559 v1(53.389,33.86)
  Bottom Layer w0.305: v2(9.017,16.51) v1(22.352,16.51) v1(35.687,16.51) v1(50.038,16.51)
DB0: U3.88 U15.16 | length 46.5
  Top Layer w0.254: U3.88@82.586,17.61 v1(83.396,17.61) ; v1(96.393,24.638) 96.266,24.765 96.266,44.196 99.193,47.123 U15.16@105.206,47.123
  Bottom Layer w0.254: v1(83.396,17.61) 84.539,17.61 85.725,18.796 89.154,18.796 94.996,24.638 v1(96.393,24.638)
DB1: U3.89 U15.17 | length 40.9
  Top Layer w0.254: v1(84.836,19.177) U3.89@84.836,19.86 ; v1(96.901,25.146) 96.774,25.273 96.774,43.688 98.234,45.148 U15.17@103.231,45.148
  Bottom Layer w0.254: v1(84.836,19.177) 85.344,19.177 85.598,19.431 89.027,19.431 94.742,25.146 v1(96.901,25.146)
DB2: U3.90 U15.18 | length 39.3
  Top Layer w0.254: U3.90@84.836,20.36 86.193,20.36 v1(86.233,20.32) ; v1(97.409,25.654) 97.282,25.781 97.282,43.18 98.75,44.648 U15.18@103.231,44.648
  Bottom Layer w0.254: v1(86.233,20.32) 86.614,19.939 88.646,19.939 94.361,25.654 v1(97.409,25.654)
DB3: U3.91 U15.19 | length 38
  Top Layer w0.254: U3.91@84.836,20.86 86.709,20.86 v1(86.868,20.701) ; v1(97.917,26.162) 97.79,26.289 97.79,42.672 99.266,44.148 U15.19@103.231,44.148
  Bottom Layer w0.254: v1(86.868,20.701) 88.519,20.701 93.98,26.162 v1(97.917,26.162)
DB4: U3.94 U15.20 | length 36.5
  Top Layer w0.254: U3.94@84.836,22.36 88.003,22.36 v1(88.011,22.352) ; v1(98.425,26.67) 98.298,26.797 98.298,42.164 99.782,43.648 U15.20@103.231,43.648
  Bottom Layer w0.254: v1(88.011,22.352) 89.281,22.352 93.65,26.721 98.374,26.721 v1(98.425,26.67)
DB5: U3.95 U15.21 | length 35.8
  Top Layer w0.254: U3.95@84.836,22.86 v1(87.376,22.86) ; v1(98.933,27.305) 98.806,27.432 98.806,41.783 100.171,43.148 U15.21@103.231,43.148
  Bottom Layer w0.254: v1(87.376,22.86) 89.027,22.86 89.789,23.622 89.789,24.257 92.837,27.305 v1(98.933,27.305)
DB6: U3.96 U15.22 | length 36.6
  Top Layer w0.254: U3.96@84.836,23.36 v1(86.733,23.36) ; v1(99.441,27.813) 99.314,27.94 99.314,41.275 100.687,42.648 U15.22@103.231,42.648
  Bottom Layer w0.254: v1(86.733,23.36) 88.638,23.36 89.154,23.876 89.154,27.559 89.408,27.813 v1(99.441,27.813)
DB7: U3.97 U15.24 | length 35.5
  Top Layer w0.254: U3.97@84.836,23.86 v1(87.36,23.86) ; v1(99.949,28.321) 99.822,28.448 99.822,40.767 100.703,41.648 U15.24@103.231,41.648
  Bottom Layer w0.254: v1(87.36,23.86) 88.376,23.86 88.646,24.13 88.646,27.94 89.027,28.321 v1(99.949,28.321)
DB8: U3.98 U15.25 | length 34.7
  Top Layer w0.254: U3.98@84.836,24.36 v1(87.987,24.36) ; v1(100.457,28.829) 100.33,28.956 100.33,40.259 101.219,41.148 U15.25@103.231,41.148
  Bottom Layer w0.254: v1(87.987,24.36) 87.987,28.551 88.265,28.829 v1(100.457,28.829)
DB9: U3.99 U15.27 | length 33.5
  Top Layer w0.254: U3.99@84.836,24.86 v1(87.344,24.86) ; v1(100.965,29.337) 100.838,29.464 100.838,39.751 101.235,40.148 U15.27@103.231,40.148
  Bottom Layer w0.254: v1(87.344,24.86) 87.344,29.051 87.63,29.337 v1(100.965,29.337)
DB10: U3.100 U15.28 | length 32.5
  Top Layer w0.254: U3.100@84.836,25.36 v1(86.701,25.36) ; v1(101.473,29.845) 101.346,29.972 101.346,39.243 101.751,39.648 U15.28@103.231,39.648
  Bottom Layer w0.254: v1(86.701,25.36) 86.741,25.4 86.741,29.591 86.995,29.845 v1(101.473,29.845)
DB11: U3.110 U15.29 | length 32.8
  Top Layer w0.254: v1(82.296,30.607) 82.543,30.36 U3.110@84.836,30.36 ; v1(102.108,30.353) 101.981,30.353 101.854,30.48 101.854,38.989 102.013,39.148 U15.29@103.231,39.148
  Bottom Layer w0.254: v1(82.296,30.607) 82.55,30.353 v1(102.108,30.353)
DB12: U3.111 U15.30 | length 29
  Top Layer w0.254: U3.111@84.836,30.86 U3.111@84.836,30.86 v1(86.36,30.861) ; U15.30@103.231,38.648 104.227,38.648 104.267,38.608 104.394,38.608 104.902,38.1 104.902,37.211 104.52,36.829 v1(104.52,30.86)
  Bottom Layer w0.254: v1(86.36,30.861) 104.519,30.861 v1(104.52,30.86) v1(104.52,30.86)
DB13: U3.112 U15.31 | length 27.1
  Top Layer w0.254: U3.112@84.836,31.36 v1(86.986,31.36) v1@86.995,31.369 ; U15.31@103.231,38.148 104.219,38.148 104.394,37.973 104.394,37.465 103.886,36.957 v1(103.886,31.369)
  Bottom Layer w0.254: v1(86.986,31.36) 103.877,31.36 v1(103.886,31.369)
DB14: U3.113 U15.32 | length 24.2
  Top Layer w0.254: U3.113@84.836,31.86 84.853,31.877 v1(87.503,31.877) ; U15.32@103.231,37.648 103.251,37.628 v1(103.251,31.877)
  Bottom Layer w0.254: v1(87.503,31.877) v1(103.251,31.877)
DB15: U3.114 U15.33 | length 23.6
  Top Layer w0.254: U3.114@84.836,32.36 84.861,32.385 v1(88.138,32.385) ; v1(105.156,32.512) 105.206,32.562 U15.33@105.206,35.673
  Bottom Layer w0.254: v1(88.138,32.385) 105.029,32.385 v1(105.156,32.512)
DEBUG_IO: P2.4 U3.1 | length 16.3
  Top Layer w0.305: v2(57.658,43.307) 58.836,42.129 U3.1@58.836,41.36
  Bottom Layer w0.305: P2.4@47.244,51.689 48.26,51.689 56.642,43.307 v2(57.658,43.307)
EMU0: P1.13 R11.2 U3.85 | length 14.5
  Top Layer w0.305: U3.85@81.086,17.61 81.086,15.688 82.296,14.478 82.296,12.573 81.661,11.938 81.661,10.033 P1.13@82.931,8.763
  Top Layer w0.457: R11.2@80.391,5.41 82.931,7.95 P1.13@82.931,8.763
EMU1: P1.14 R12.2 U3.86 | length 14.2
  Top Layer w0.305: U3.86@81.586,17.61 81.586,16.077 82.804,14.859 82.804,11.43 P1.14@82.931,11.303
  Top Layer w0.457: R12.2@82.931,5.41 84.582,7.061 84.582,9.779 83.058,11.303 P1.14@82.931,11.303
FQ-UD_A: U3.17 U5.8 | length 71
  Top Layer w0.254: v1(50.841,33.36) U3.17@58.836,33.36
  Top Layer w0.305: v1(11.557,9.525) 11.557,10.885 U5.8@11.594,10.922
  Bottom Layer w0.254: 45.085,11.557 50.079,11.557 50.841,12.319 v1(50.841,33.36)
  Bottom Layer w0.305: v1(11.557,9.525) 11.557,9.652 13.462,11.557 45.085,11.557
FQ-UD_B: U3.20 U6.8 | length 56.7
  Top Layer w0.254: v1(52.705,31.86) U3.20@58.836,31.86
  Top Layer w0.305: U6.8@24.87,10.857 24.87,9.42 v1(24.892,9.398) v1@24.892,9.525
  Bottom Layer w0.254: 46.787,10.084 51.232,10.084 52.705,11.557 v1(52.705,31.86)
  Bottom Layer w0.305: v1(24.892,9.398) 25.578,10.084 46.787,10.084
FQ-UD_C: U3.62 U7.8 | length 38.6
  Top Layer w0.305: U7.8@38.205,10.857 38.205,9.547 v1(38.227,9.525) ; U3.62@69.586,17.61 69.586,16.266 v2(69.596,16.256)
  Bottom Layer w0.305: v1(38.227,9.525) 63.373,9.525 64.77,10.922 64.77,13.97 67.056,16.256 v2(69.596,16.256)